# Altium PCB Rev1.PcbDoc
Units mil, origin at the board's own origin, x right, y up, seen from the top; angles counter-clockwise.
Board outline 1205 x 1605 mil, 2 copper layers (Top Layer, Bottom Layer); 15 components, 36 nets, 101 pads, 42 vias.
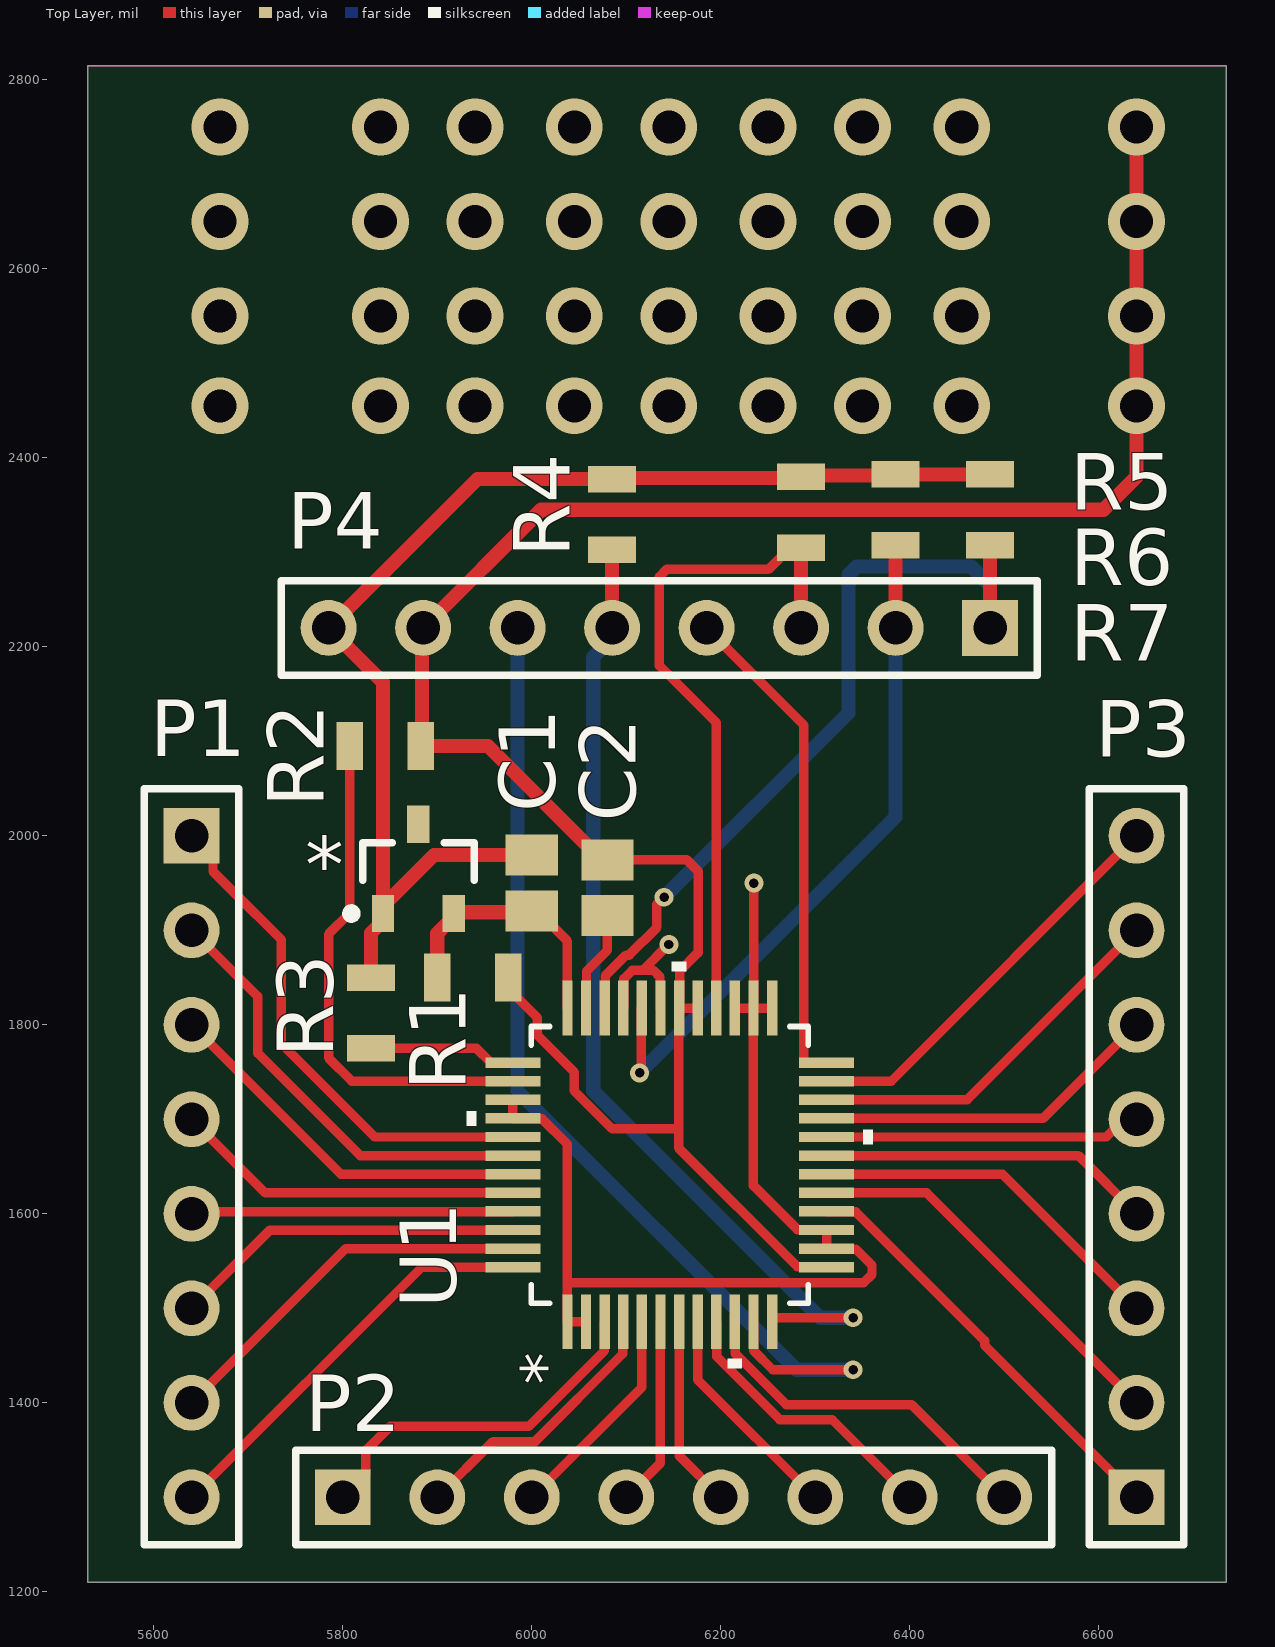
[diagram p0: Top Layer view]
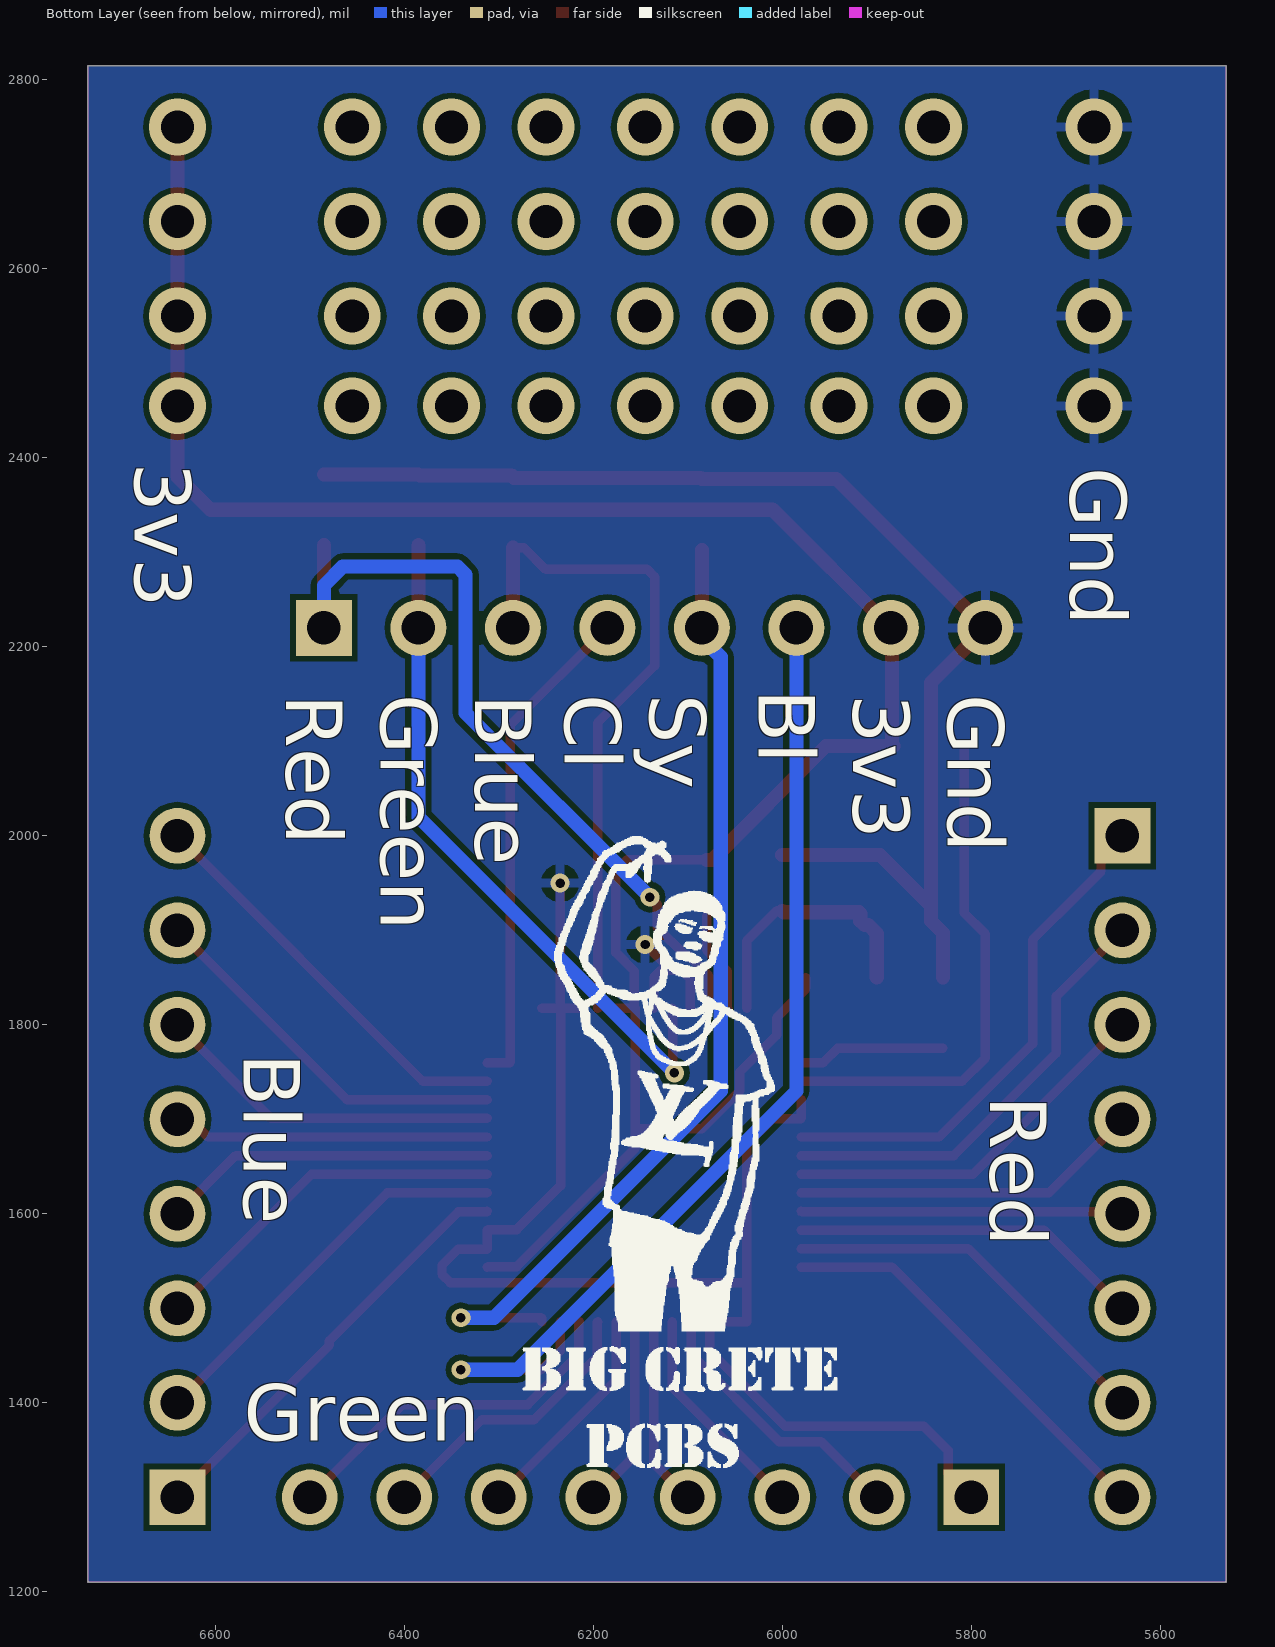
[diagram p1: Bottom Layer view, seen from below]

## Layer stack, top to bottom
Top Solder: solder mask 0.4, Solder Resist, Dk 3.5
Top Layer: signal copper 1.4
Dielectric 1: dielectric 12.6, FR-4, Dk 4.8
Bottom Layer: signal copper 1.4
Bottom Solder: solder mask 0.4, Solder Resist, Dk 3.5

## Board outline
5530,2815 6735,2815 6735,1210 5530,1210

## Design rules (kind name [scope] priority, off if disabled: settings)
Clearance [All] p1: gap=6 ignorepadtopadclearanceinfootprint=FALSE
PolygonConnect [All] p1: connectstyle=Relief reliefconductorwidth=10 reliefentries=4 polygonreliefangle="90 Angle" airgapwidth=10
RoutingVias [All] p1: holewidth=28 width=50 viastyle="Through Hole" minholewidth=28 minwidth=50 maxholewidth=28 maxwidth=50
SolderMaskExpansion [All] p1: expansion=4 istentingtop=FALSE
Width [All] p1: maxlimit=50 minlimit=10 preferedwidth=15
30 further rules are at their usual default settings.

## Components (designator, comment, footprint, x,y, rotation, side; value= is the part's Value field where it differs from the comment)
* "Shunt" SOT95P245X110-3N 5880,1965 r90 top
C1 "Cap Pol3" C0805 6000,1950 r90 top value=1uf
C2 "Cap Pol3" C0805 6080,1945 r90 top value=0.1uf
P1 "Header 8" HDR1X8 5640,2000 r270 top
P2 "Header 8" HDR1X8 5800,1300 r0 top
P3 "Header 8" HDR1X8 6640,1300 r90 top
P4 "Header 8" HDR1X8 6485,2220 r180 top
R1 "1k" 805 5937.5,1850 r0 top
R2 "10k" 805 5845,2095 r0 top
R3 "530" 805 5830,1812.5 r90 top
R4 "10k" 805 6085,2340 r270 top
R5 "75" 805 6485,2345 r90 top
R6 "75" 805 6385,2345 r90 top
R7 "75" 805 6285,2342.5 r90 top
U1 "ADV7125KSTZ50" ST_48_ADI 6146,1651.73 r90 top

## Footprints (in the part's own frame and the unit in brackets; to place one, negate y for a bottom-side part, rotate by r counter-clockwise, add the part's x,y. Pads: shape width x height; smd on the part's side, far side on the other; paste and mask are expansions set on the pad)
805 [mil]
  rect 28x51 smd: 1(-37.5,0) 2(37.5,0)
C0805 [mm] "Chip Capacitor, Body 2.0x1.3mm, IPC High Density"
  rect 1.1x1.4 smd: 1(-0.75,0) 2(0.75,0)
  body extent -1.1,-0.72 1.1,0.72, height 1.4
HDR1X8 [mm] "Connector; Header; 8 Position"
  rect 1.5x1.5 hole 0.9: 1(0,0)
  round 1.5 hole 0.9: 2(2.54,0) 3(5.08,0) 4(7.62,0) 5(10.16,0) 6(12.7,0) 7(15.24,0) 8(17.78,0)
  silkscreen extent -1.27,-1.27 19.05,1.27
SOT95P245X110-3N [mm] "SOT23, 3-Leads, Body 2.90x2.45mm, Pitch 0.95mm, IPC Medium Density"
  rect 1x0.6 smd: 1(-1.2,0.95) 2(-1.2,-0.95) 3(1.2,0)
  silkscreen extent -1.32,-1.5 0.7,1.92, body extent -0.7,-1.5 0.7,1.5, height 1.1
ST_48_ADI [mil]
  rect 58x11 smd paste+0 mask+0: 1(-166,108.27) 2(-166,88.58) 3(-166,68.9) 4(-166,49.21) 5(-166,29.53) 6(-166,9.84) 7(-166,-9.84) 8(-166,-29.53) 9(-166,-49.21) 10(-166,-68.9) 11(-166,-88.58) 12(-166,-108.27) 25(166,-108.27) 26(166,-88.58) 27(166,-68.9) 28(166,-49.21) 29(166,-29.53) 30(166,-9.84) 31(166,9.84) 32(166,29.53) 33(166,49.21) 34(166,68.9) 35(166,88.58) 36(166,108.27)
  rect 11x58 smd paste+0 mask+0: 13(-108.27,-166) 14(-88.58,-166) 15(-68.9,-166) 16(-49.21,-166) 17(-29.53,-166) 18(-9.84,-166) 19(9.84,-166) 20(29.53,-166) 21(49.21,-166) 22(68.9,-166) 23(88.58,-166) 24(108.27,-166) 37(108.27,166) 38(88.58,166) 39(68.9,166) 40(49.21,166) 41(29.53,166) 42(9.84,166) 43(-9.84,166) 44(-29.53,166) 45(-49.21,166) 46(-68.9,166) 47(-88.58,166) 48(-108.27,166)
  silkscreen extent -215,-215 215,215, body extent 0,0 10,10, height 10

## Part data
C1 C2: "Polarized Capacitor (Surface Mount)", LatestRevisionDate=29-May-2009, LatestRevisionNote="IPC-7351 Footprint Added.", PackageDescription="Chip Capacitor", PackageReference=C0805, Published=8-Jun-2000, Publisher="Altium Limited"
P1 P2 P3 P4: "Header, 8-Pin", LatestRevisionDate=17-Jul-2002, LatestRevisionNote="Re-released for DXP Platform.", Publisher="Altium Limited"
R2 R3 R4 R5 R6 R7: library part 1k
U1: "No Description Available", Built_By=EMA_UL_Team, Copyright="Copyright (C) 2018 Accelerated Designs. All rights reserved", Manufacturer_Part_Number=ADV7125KSTZ50, RefDes=RefDes, SourceLibrary=Analog_2012-01-01_8, Type=DEV, Vendor="Analog Devices Inc"

## Via types
v1: diameter 60, hole 35, Top Layer to Bottom Layer, 36 vias
v2: diameter 20, hole 10, Top Layer to Bottom Layer, 6 vias

## Nets (pads, with @x,y where several pads share a name; then routed paths per layer and width w, separated by ;. In a path a pad name is that pad's centre, name@x,y a point inside that pad or via, vN(x,y) a via of type N, cw(c..) or ccw(c..) an arc to the next point about the centre after c; other vN are vias at no path point)
GND: *.1 C1.2 P4.8 R3.2 R4.1 R5.2 R6.2 R7.2 U1.1 U1.2 U1.14 U1.15 U1.25 U1.26 U1.27 U1.31 U1.33 U1.39 U1.40 | length 2658.9
  Top Layer w10: U1.39 U1.40 5980.5,1700.44 6010.87,1700.44 6037.73,1673.58 6037.73,1530 ; U1.2 U1.1 6037.73,1530 ; U1.33 6097.29,1818.23 6097.29,1848.6 6106.42,1857.73 6117.53,1857.73 ; U1.31 6135.66,1818.23 6135.66,1850.72 6128.65,1857.73 6117.53,1857.73 ; v2(6145,1885) 6144.8,1885 6117.53,1857.73 ; U1.27 U1.26 ; v2(6235,1950) 6234.79,1949.79 6234.79,1817.94 U1.26 ; U1.25 U1.26 ; 6037.73,1530 6040.77,1526.96 6351.11,1526.96 6360,1535.86 6360,1545.52 6342.87,1562.65 6312.5,1562.65 U1.14 U1.15 6311.5,1583.33 6281.13,1583.33 6234.58,1629.88 U1.26
  Top Layer w15: R3.2 5830,1897.28 5842.6,1909.88 *.1 *.1@5842.6,1925.63 ; C1.2 5896.5,1979.53 *.1@5842.6,1925.63 ; R5.2 R6.2 6383.75,2381.25 6286.25,2381.25 R7.2 6283.75,2378.75 6086.25,2378.75 R4.1 5942.5,2377.5 P4.8 5842.6,2162.4 *.1@5842.6,1925.63
  other v1: 5670,2455 5670,2550 5670,2650 5670,2750
Net*_2: *.2 C1.1 R1.1 U1.36 | length 283
  Top Layer w10: C1.1 6005.91,1920.47 6037.73,1888.65 U1.36
  Top Layer w15: R1.1 5900,1896.78 5908.79,1905.57 5913.09,1905.57 5917.4,1909.88 *.2 5918.76,1919.11 5998.64,1919.11 C1.1
NetC2_1: C2.1 U1.35 | length 107.1
  Top Layer w10: U1.35 6057.92,1818.23 6057.92,1856.74 6080,1878.82 C2.1
NetC2_2: C2.2 P4.7 R1.2 R2.2 U1.13 U1.29 U1.30 | length 2471.7
  Top Layer w10: R1.2 5975,1838.5 6005.84,1807.66 6005.84,1789.16 6045,1750 6045,1730 6085,1690 6155.34,1690 ; C2.2 6164.14,1974.53 6176,1962.67 6176,1876.37 6156.34,1856.71 6156.34,1818.23 U1.30 ; U1.29 U1.30 ; U1.13 6311.5,1543.96 6281.13,1543.96 6155.34,1669.75 6155.34,1690 ; 6155.34,1690 6155.34,1817.23 U1.30
  Top Layer w15: C2.2 6074.09,1974.53 5953.62,2095 R2.2 5883.75,2096.25 5883.75,2218.75 P4.7 6010,2345 6605,2345 6640,2380 v1(6640,2455) v1(6640,2550) v1(6640,2650) v1(6640,2750)
NetP1_1: P1.1 U1.41 | length 545.2
  Top Layer w10: P1.1 5662.63,1977.37 5662.63,1962.37 5684.47,1940.53 5735,1890 5735,1780 5833.74,1681.26 U1.41
NetP1_2: P1.2 U1.42 | length 473.9
  Top Layer w10: P1.2 5710,1830 5710,1770 5818.43,1661.57 U1.42
NetP1_3: P1.3 U1.43 | length 405.5
  Top Layer w10: P1.3 5798.11,1641.89 U1.43
NetP1_4: P1.4 U1.44 | length 372.2
  Top Layer w10: P1.4 5717.8,1622.2 U1.44
NetP1_5: P1.5 U1.45 | length 341
  Top Layer w10: P1.5 5642.02,1602.02 5979.5,1602.02 U1.45
NetP1_6: P1.6 U1.46 | length 374.3
  Top Layer w10: P1.6 5722.83,1582.83 U1.46
NetP1_7: P1.7 U1.47 | length 407.6
  Top Layer w10: P1.7 5803.15,1563.15 U1.47
NetP1_8: P1.8 U1.48 | length 440.8
  Top Layer w10: P1.8 5883.46,1543.46 U1.48
NetP2_1: P2.1 U1.3 | length 386.5
  Top Layer w10: P2.1 5824.53,1324.53 5824.53,1349.53 5850,1375 5996.74,1375 6076.6,1454.86 6076.6,1485.23 U1.3
NetP2_2: P2.2 U1.4 | length 293.2
  Top Layer w10: P2.2 5959,1359 6003.37,1359 6096.29,1451.92 6096.29,1485.23 U1.4
NetP2_3: P2.3 U1.5 | length 234
  Top Layer w10: P2.3 6116.47,1416.47 U1.5
NetP2_4: P2.4 U1.6 | length 200.7
  Top Layer w10: P2.4 6136.16,1336.16 U1.6
NetP2_5: P2.5 U1.7 | length 204
  Top Layer w10: U1.7 6155.84,1344.16 P2.5
NetP2_6: P2.6 U1.8 | length 237.3
  Top Layer w10: U1.8 6175.53,1424.47 P2.6
NetP2_7: P2.7 U1.9 | length 303
  Top Layer w10: U1.9 6195.71,1485.23 6195.71,1448.98 6262.57,1382.12 6317.88,1382.12 P2.7
NetP2_8: P2.8 U1.10 | length 381.5
  Top Layer w10: U1.10 6215.4,1485.23 6215.4,1451.92 6269.19,1398.12 6401.88,1398.12 P2.8
NetP3_1: P3.1 U1.16 | length 456.2
  Top Layer w10: U1.16 6312.5,1602.02 6342.87,1602.02 6479.17,1465.72 6479.17,1460.83 P3.1
NetP3_2: P3.2 U1.17 | length 420
  Top Layer w10: U1.17 6417.8,1622.2 P3.2
NetP3_3: P3.3 U1.18 | length 386.8
  Top Layer w10: U1.18 6498.11,1641.89 P3.3
NetP3_4: P3.4 U1.19 | length 353.5
  Top Layer w10: U1.19 6578.43,1661.57 P3.4
NetP3_5: P3.5 U1.20 | length 335.8
  Top Layer w10: U1.20 6607.99,1681.26 6626.73,1700 P3.5
NetP3_6: P3.6 U1.21 | length 369
  Top Layer w10: U1.21 6540.94,1700.94 P3.6
NetP3_7: P3.7 U1.22 | length 402.3
  Top Layer w10: U1.22 6460.63,1720.63 P3.7
NetP3_8: P3.8 U1.23 | length 435.6
  Top Layer w10: U1.23 6380.31,1740.32 P3.8
NetP4_1: P4.1 R5.1 U1.34 | length 861.6
  Top Layer w10: U1.34 6077.6,1818.23 6077.6,1851.55 6099.79,1873.73 6103.03,1873.73 6132.35,1903.05 6132.35,1927.35 v2(6140,1935)
  Top Layer w15: P4.1 R5.1
  Bottom Layer w15: v2(6140,1935) 6335,2130 6335,2276.21 6343.79,2285 6465,2285 6485,2265 P4.1
NetP4_2: P4.2 R6.1 U1.32 | length 740.2
  Top Layer w10: v2(6114.12,1749.12) 6115.97,1750.97 6115.97,1817.23 U1.32
  Top Layer w15: P4.2 R6.1
  Bottom Layer w15: v2(6114.12,1749.12) 6385,2020 P4.2
NetP4_3: P4.3 R7.1 U1.28 | length 729.1
  Top Layer w10: U1.28 6195.21,2119.79 6135,2180 6135,2274.14 6142.72,2281.86 6250.36,2281.86 6273.5,2305 R7.1
  Top Layer w15: P4.3 R7.1
NetP4_4: P4.4 U1.24 | length 526.4
  Top Layer w10: P4.4 6288,2117 6288,1760.5 6288.5,1760 U1.24
NetP4_5: P4.5 R4.2 U1.12 | length 1044.9
  Top Layer w10: U1.12 6254.27,1489.5 6254.77,1490 v2(6340,1490)
  Top Layer w15: P4.5 R4.2
  Bottom Layer w15: P4.5 6085,2209.19 6065,2189.19 6065,1730 6305,1490 v2(6340,1490)
NetP4_6: P4.6 U1.11 | length 1111.4
  Top Layer w10: U1.11 6235.08,1485.23 6235.08,1454.86 6254.94,1435 v2(6340,1435)
  Bottom Layer w15: P4.6 5985,1730 6280,1435 v2(6340,1435)
NetR2_1: R2.1 U1.38 | length 544.6
  Top Layer w10: R2.1 5807.5,1918.5 5785,1896 5785,1764.94 5809.63,1740.32 U1.38
NetR3_1: R3.1 U1.37 | length 156.2
  Top Layer w10: R3.1 5941.5,1775 5956.5,1760 U1.37
pads on no net: *.3
copper on no net:
  other v1: 5840,2455 5940,2455 6045,2455 6145,2455 6250,2455 6350,2455 6455,2455 5840,2550 5940,2550 6045,2550 6145,2550 6250,2550 6350,2550 6455,2550 5840,2650 5940,2650 6045,2650 6145,2650 6250,2650 6350,2650 6455,2650 5840,2750 5940,2750 6045,2750 6145,2750 6250,2750 6350,2750 6455,2750

## Polygon pours and split planes (outlines as drawn)
GND on Bottom Layer "GND_L02_P000" (solid, pour order 0): 5530,2815 6735,2815 6735,1210 5530,1210

## Keep-outs
Keep-Out Layer:
  the board outline again, w1

## Silkscreen, mask and mechanical layers (free items; w line width, h text height)
Bottom Overlay:
  drawing of 3753 lines, arcs and shapes, not listed
  text "3v3" at 6685,2395 h60 r90
  text "Gnd" at 5695,2390 h60 r90
  text "Bl" at 6025,2155 h60 r90
  text "Gnd" at 5825,2150 h60 r90
  text "3v3" at 5925,2150 h60 r90
  text "Sy" at 6140,2150 h60 r90
  text "Cl" at 6230,2150 h60 r90
  text "Blue" at 6325,2150 h60 r90
  text "Green" at 6425,2150 h60 r90
  text "Red" at 6525,2150 h60 r90
  text "Blue" at 6570,1770 h60 r90
  text "Red" at 5780,1725 h60 r90
  text "Green" at 6570,1360 h60

## Text inside footprints (layer, text, board x,y; h text height)
U1: Top Overlay "*" at 6037.89,1419.23 h50 r90; Mechanical 7 "0.362in/9.195mm" at 6158.5,2027.73 h25 r90; Mechanical 7 "0.283in/7.188mm" at 6158.5,1163.23 h25 r90; Mechanical 7 "0.283in/7.188mm" at 6472,1557.98 h25 r90; Mechanical 7 "0.362in/9.195mm" at 5770,1557.98 h25 r90; Mechanical 7 "0.03in/0.762mm" at 5845,1730.23 h25 r90; Mechanical 7 "0.02in/0.5mm" at 6060.07,1952.73 h25 r90; Mechanical 13 "*" at 6052.89,1512.73 h50 r90